# EAGLE board perfect_cube (EAGLE 9.5.1)
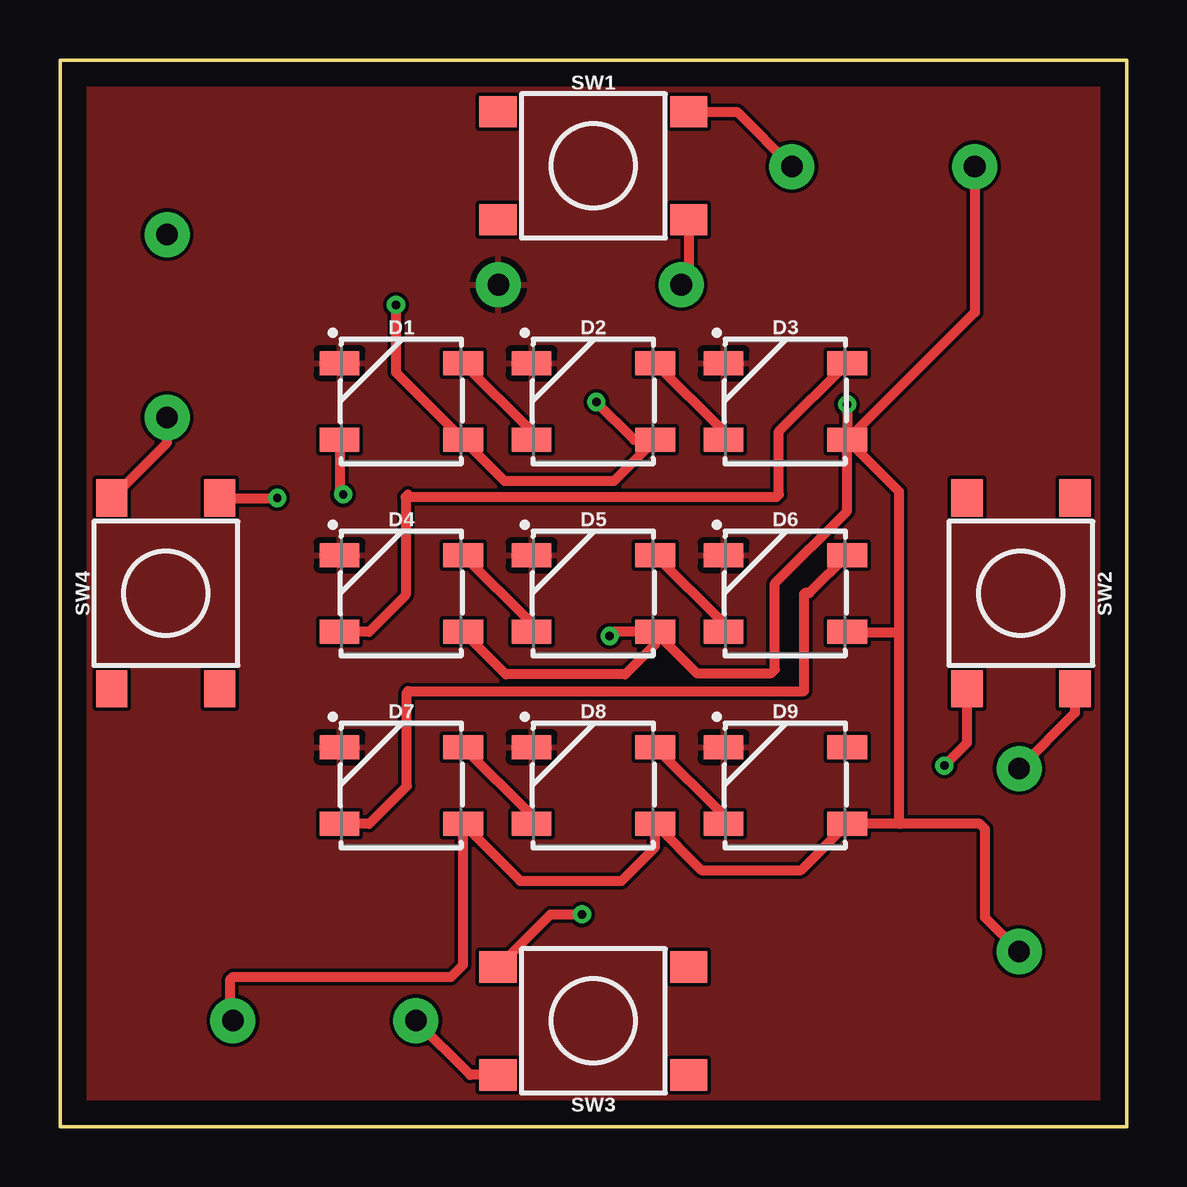
[diagram p0: board, top side]
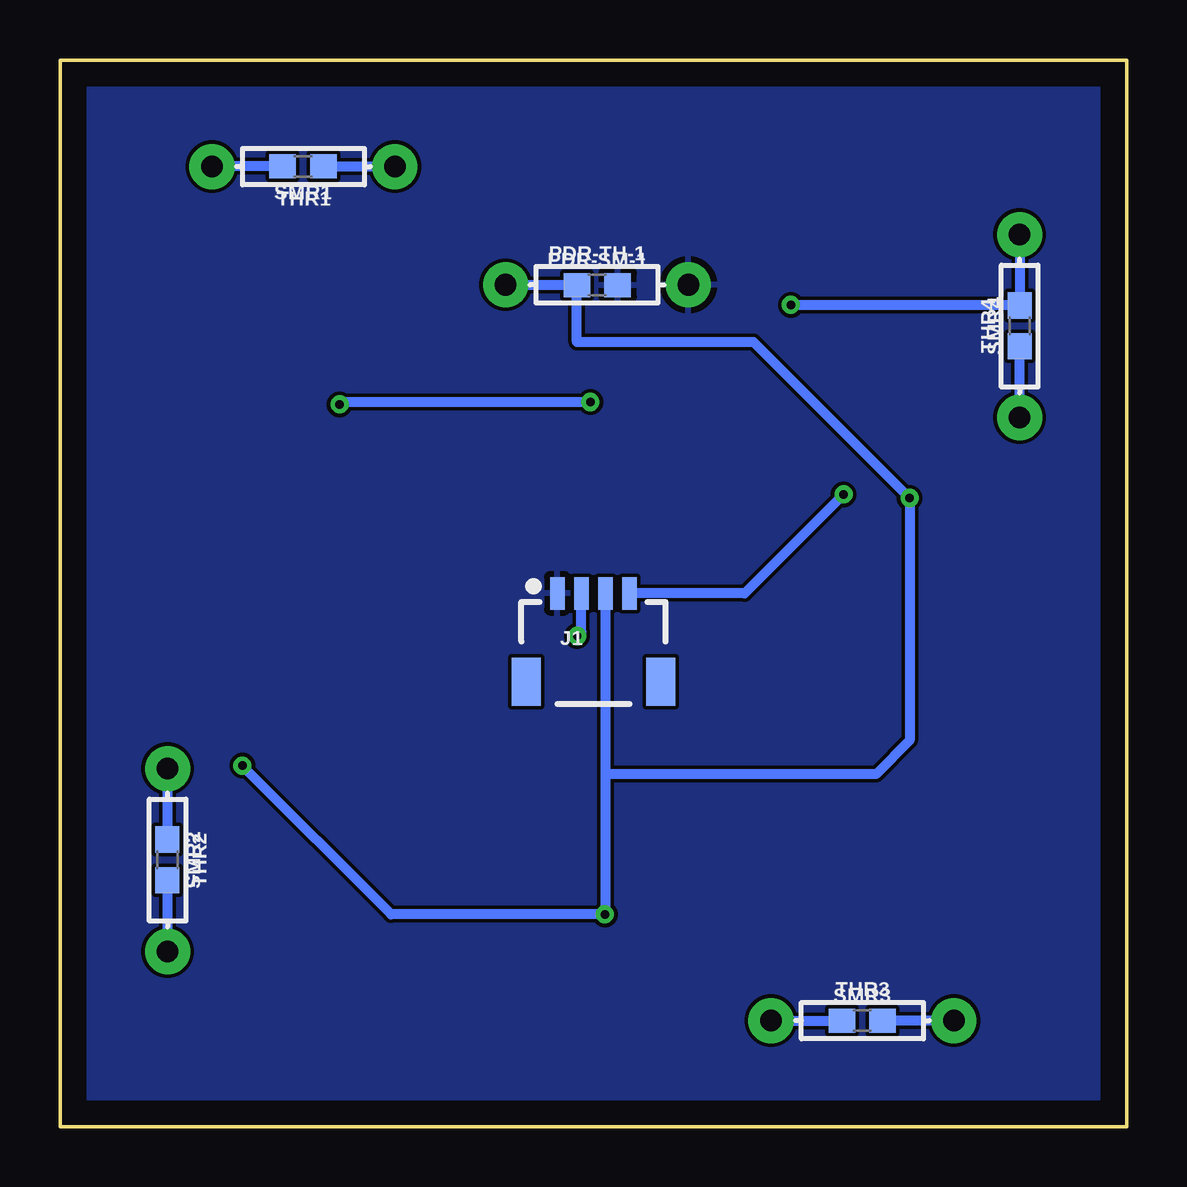
[diagram p1: board, bottom side, seen from below]

Size 44.45 x 44.45 mm. Coordinates in mm from the lower left corner, seen from the top.
Outline: 0,0 0,44.45 44.45,44.45 44.45,0 0,0
Copper layers (1*16): Top 0.035mm / dielectric 1.5mm / Bottom 0.035mm
Design rules "default": minimum track width 6mil, minimum drill 0.35mm, track to track 6mil, track to pad 6mil, pad to pad 6mil, via to via 6mil, smd to smd 6mil, copper to edge 40mil, drill to drill 6mil, minimum pad ring 10mil, minimum via ring 8mil, stop-mask expansion 4mil, vias tented up to drill 0mil, thermal gap 10mil

## Footprints (pad centres in the part's own frame; a part is rotated, then mirrored left to right if it is on the bottom)
WS2812B = smd 1.651 x 1: 1 2.577,-1.6; 2 2.577,1.6; 3 -2.577,1.6; 4 -2.577,-1.6
1X04_1MM_RA = smd 0.6 x 1.35: 1 -1.5,0; 2 -0.5,0; 3 0.5,0; 4 1.5,0 | smd 1.2 x 2: NC1 2.8,-3.675; NC2 -2.8,-3.675
0603 = smd 1.1 x 1: 1 -0.85,0; 2 0.85,0
AXIAL-0.3 = drill 0.9 pad 1.88: P$1 -3.81,0; P$2 3.81,0
TACTILE_SWITCH_SMD_6.2MM_TALL = smd 1.55 x 1.3: A1 -3.975,-2.25; A2 3.975,-2.25; B1 -3.975,2.25; B2 3.975,2.25

## Placement (x,y rotation side)
D1  WS2812B  [WS2812B]  14.22,30.23 0 top
D2  WS2812B  [WS2812B]  22.23,30.23 0 top
D3  WS2812B  [WS2812B]  30.23,30.23 0 top
D4  WS2812B  [WS2812B]  14.22,22.23 0 top
D5  WS2812B  [WS2812B]  22.23,22.23 0 top
D6  WS2812B  [WS2812B]  30.23,22.23 0 top
D7  WS2812B  [WS2812B]  14.22,14.22 0 top
D8  WS2812B  [WS2812B]  22.23,14.22 0 top
D9  WS2812B  [WS2812B]  30.23,14.22 0 top
J1  [1X04_1MM_RA]  22.23,22.23 0 bottom
PDR-SM-1  1k  [0603]  22.07,35.06 0 bottom
PDR-TH-1  1k  [AXIAL-0.3]  22.07,35.09 0 bottom
SMR1  1k  [0603]  34.33,40.02 180 bottom
SMR2  1k  [0603]  39.98,11.12 270 bottom
SMR3  1k  [0603]  11.03,4.42 0 bottom
SMR4  1k  [0603]  4.46,33.38 90 bottom
SW1  MOMENTARY-SWITCH-SPST-SMD-6.2MM-TALL  [TACTILE_SWITCH_SMD_6.2MM_TALL]  22.23,40.04 0 top
SW2  MOMENTARY-SWITCH-SPST-SMD-6.2MM-TALL  [TACTILE_SWITCH_SMD_6.2MM_TALL]  40.04,22.23 270 top
SW3  MOMENTARY-SWITCH-SPST-SMD-6.2MM-TALL  [TACTILE_SWITCH_SMD_6.2MM_TALL]  22.23,4.41 180 top
SW4  MOMENTARY-SWITCH-SPST-SMD-6.2MM-TALL  [TACTILE_SWITCH_SMD_6.2MM_TALL]  4.41,22.23 90 top
THR1  1k  [AXIAL-0.3]  34.3,40.01 180 bottom
THR2  1k  [AXIAL-0.3]  39.97,11.12 270 bottom
THR3  1k  [AXIAL-0.3]  11.02,4.42 0 bottom
THR4  1k  [AXIAL-0.3]  4.46,33.37 90 bottom

## Library data of the parts
D1-D9 = SparkFun-LED; PROD_ID: DIO-12503
J1 = SparkFun-Connectors
PDR-SM-1 SMR1-SMR4 = SparkFun-Resistors; PROD_ID: RES-07856
PDR-TH-1 THR1-THR4 = SparkFun-Resistors; PROD_ID: RES-12182
SW1-SW4 = SparkFun-Switches; PROD_ID: SWCH-11966; SF_SKU: COM-12992

## Nets
5V: D1.1 D2.1 D3.1 D4.1 D5.1 D6.1 D7.1 D8.1 D9.1 J1.2 SMR1.2 SMR2.2 SMR3.2 SMR4.2 THR1.P$2 THR2.P$2 THR3.P$2 THR4.P$2
A0: J1.3 PDR-SM-1.1 PDR-TH-1.P$1 SW1.A2 SW2.A2 SW3.A2 SW4.A2
D2DI: D1.2 D2.4
D3DI: D2.2 D3.4
D4DI: D3.2 D4.4
D5DI: D4.2 D5.4
D6DI: D5.2 D6.4
D7DI: D6.2 D7.4
D8DI: D7.2 D8.4
D9DI: D8.2 D9.4
DI: D1.4 J1.4
GND: D1.3 D2.3 D3.3 D4.3 D5.3 D6.3 D7.3 D8.3 D9.3 J1.1 PDR-SM-1.2 PDR-TH-1.P$2
N$1: SMR1.1 SW1.B2 THR1.P$1
N$3: SMR2.1 SW2.B2 THR2.P$1
N$4: SMR3.1 SW3.B2 THR3.P$1
N$5: SMR4.1 SW4.B2 THR4.P$1

## Tracks (layer width: path | path; a pad name or v marks a point on that pad's centre or on a via)
5V  (via drill 0.35)
  Top 0.406: THR2.P$2 38.55,8.72 38.55,12.4 38.33,12.62 35,12.62 | 35,12.62 D9.1 30.88,10.7 26.73,10.7 D8.1 24.8,11.65 23.4,10.25 19.18,10.25 D7.1 16.8,6.75 16.3,6.25 7.2,6.25 7.1,6.15 7.1,4.53 THR3.P$2 | THR1.P$2 38.12,33.94 D3.1 | D3.1 34.95,26.48 34.95,20.6 | 34.95,20.6 34.95,12.68 35,12.62 | D6.1 32.83,20.6 34.95,20.6 | D4.1 18.58,18.85 23.55,18.85 24.8,20.1 D5.1 | D5.1 26.53,18.9 29.64,18.9 29.79,19.05 29.79,22.64 32.8,25.65 D3.1 | v14,34.25 14,31.43 D1.1 18.52,26.91 23.09,26.91 D2.1 23.93,28.62 v22.35,30.2 | v32.8,30.1 D3.1 | D5.1 23.07,20.62 v22.9,20.45
  Bottom 0.406: THR4.P$2 SMR4.2 13.97,34.23 v14,34.25 | SMR1.2 38.1,40.02 THR1.P$2 | THR2.P$2 39.97,10.27 SMR2.2 | THR3.P$2 10.16,4.42 SMR3.2 | v22.35,30.2 32.7,30.2 v32.8,30.1 | v22.9,20.45 22.73,20.62 J1.2
A0  (via drill 0.35)
  Top 0.406: SW1.A2 26.2,35.4 PDR-TH-1.P$1 | SW4.A2 v9.05,26.2 | 37.69,18.15 SW2.A2 37.79,15.99 v36.85,15.05 | SW3.A2 20.44,8.85 v21.75,8.85
  Bottom 0.406: PDR-TH-1.P$1 22.93,35.09 PDR-SM-1.1 22.91,32.72 22.9,32.7 15.55,32.7 v9.05,26.2 9.05,16.1 10.45,14.7 21.73,14.7 | J1.3 21.73,14.7 | 21.73,14.7 21.73,8.88 v21.75,8.85 30.65,8.85 v36.85,15.05
D2DI
  Top 0.406: D1.2 19.65,28.98 D2.4
D3DI
  Top 0.406: D2.2 27.65,28.98 D3.4
D4DI
  Top 0.406: D3.2 29.95,28.97 29.95,26.35 29.85,26.25 14.4,26.25 | 14.5,26.35 14.4,26.25 | 14.4,26.25 14.4,22.15 12.88,20.62 D4.4
D5DI
  Top 0.406: D4.2 19.65,20.98 D5.4
D6DI
  Top 0.406: D5.2 27.65,20.98 D6.4
D7DI
  Top 0.406: D7.4 12.88,12.62 14.45,14.2 14.45,18.1 14.5,18.15 31,18.15 31,22.2 31.05,22.25 31.23,22.25 D6.2
D8DI
  Top 0.406: D7.2 19.65,12.98 D8.4
D9DI
  Top 0.406: D8.2 27.65,12.98 D9.4
DI  (via drill 0.35)
  Top 0.406: D1.4 11.65,26.5 v11.8,26.35
  Bottom 0.406: v11.8,26.35 15.93,22.23 J1.4
GND
  pour Top: 0,44 44,44 44,0 0,0
  pour Bottom: 0,44 44,44 44,0 0,0
N$1
  Top 0.406: SW1.B2 28.21,42.29 THR1.P$1
  Bottom 0.406: THR1.P$1 33.47,40.01 SMR1.1
N$3
  Top 0.406: SW2.B2 42.29,17.25 THR2.P$1
  Bottom 0.406: THR2.P$1 39.98,14.91 SMR2.1
N$4
  Top 0.406: SW3.B2 17.09,2.16 THR3.P$1
  Bottom 0.406: THR3.P$1 SMR3.1
N$5
  Top 0.406: SW4.B2 4.46,28.5 THR4.P$1
  Bottom 0.406: THR4.P$1 SMR4.1